# EAGLE board E-Reader_v59 (EAGLE 9.7.0)
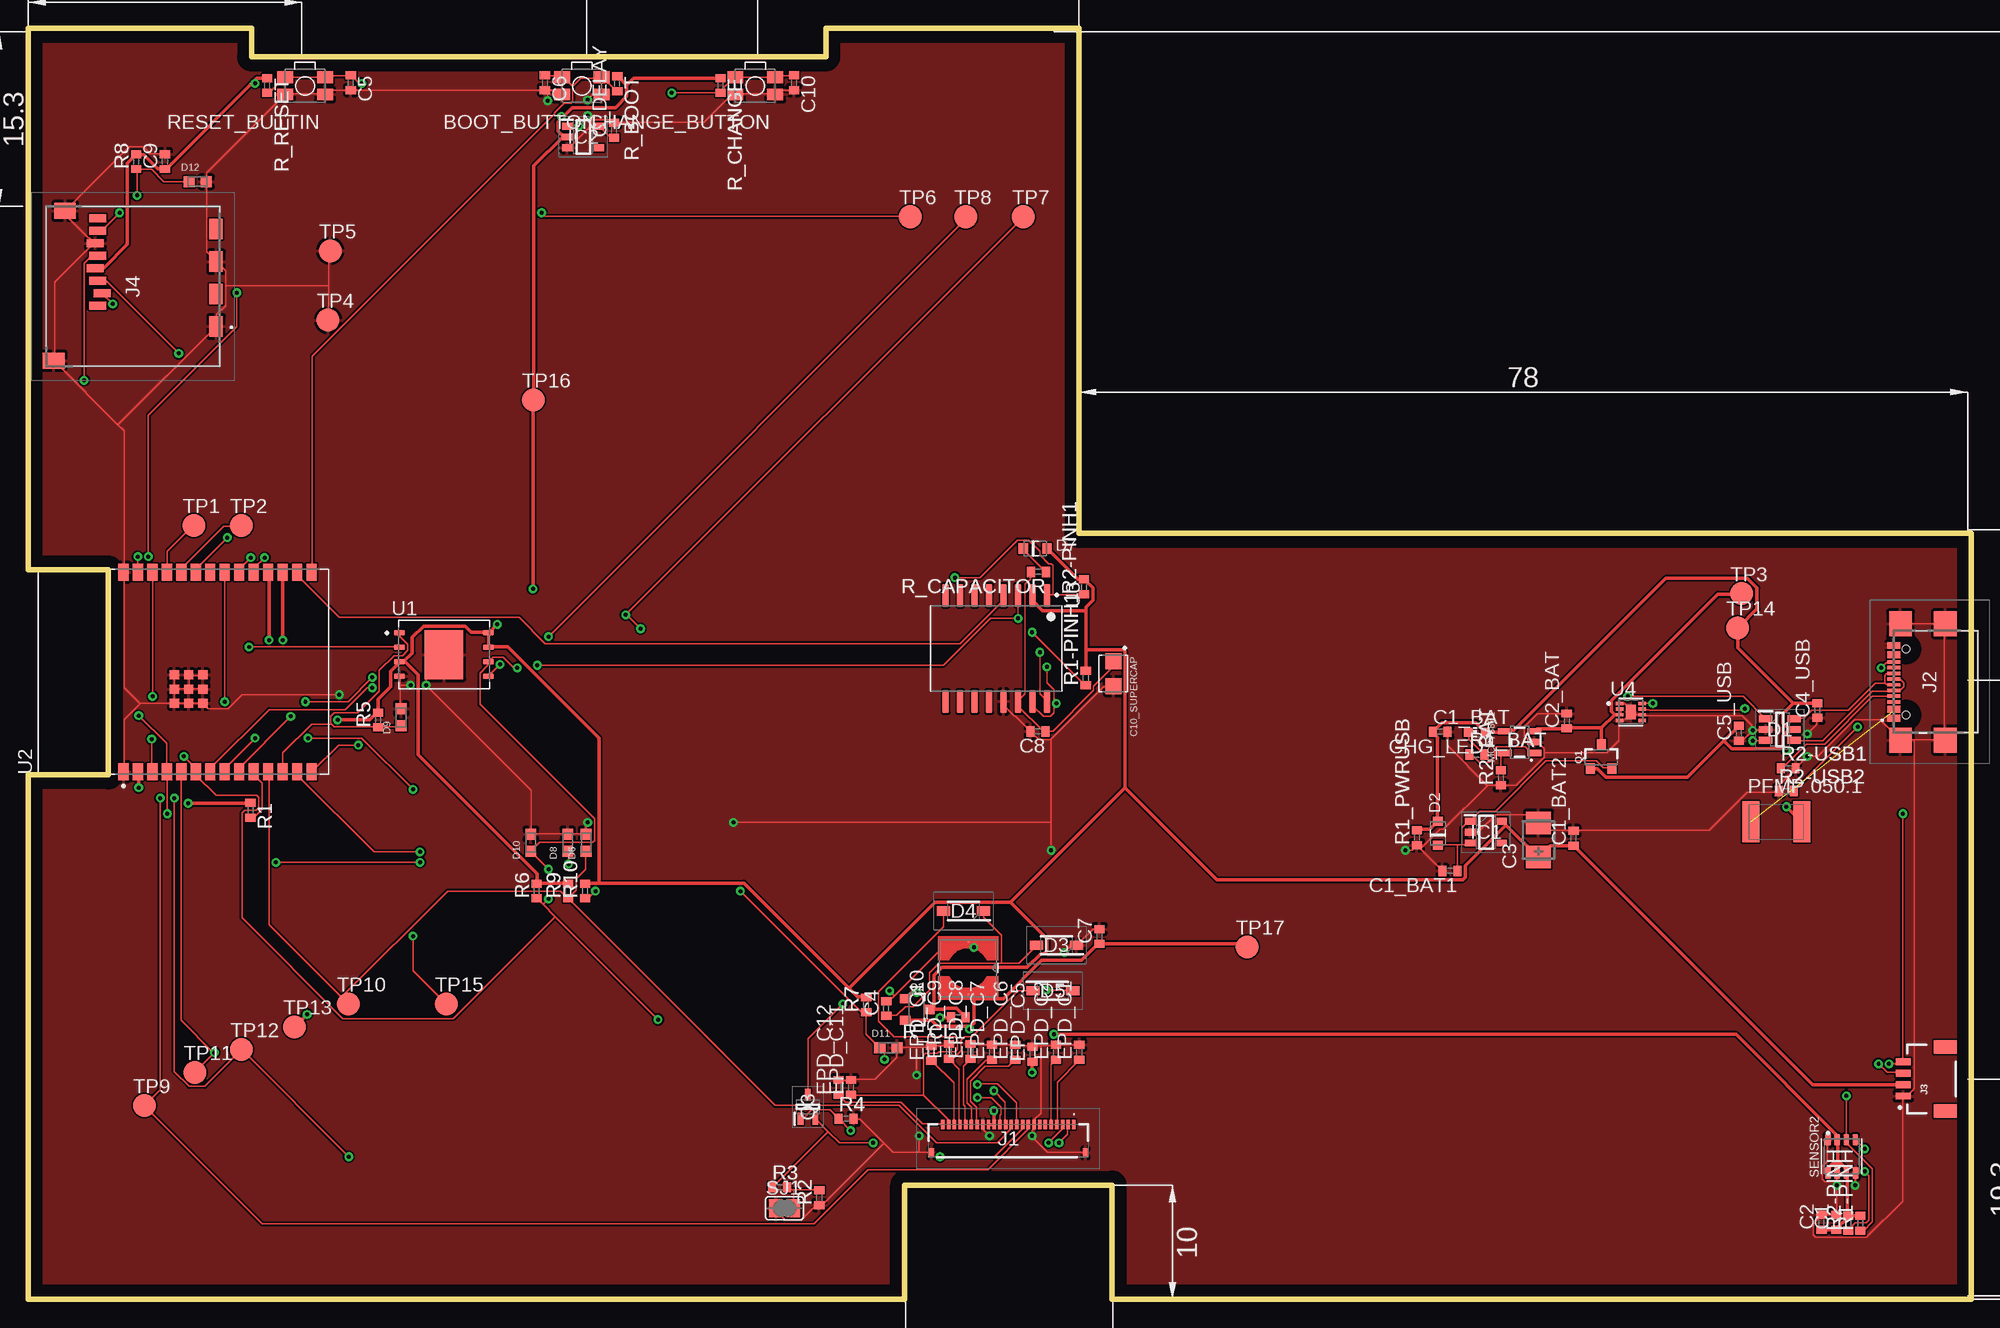
[diagram p0: board, top side]
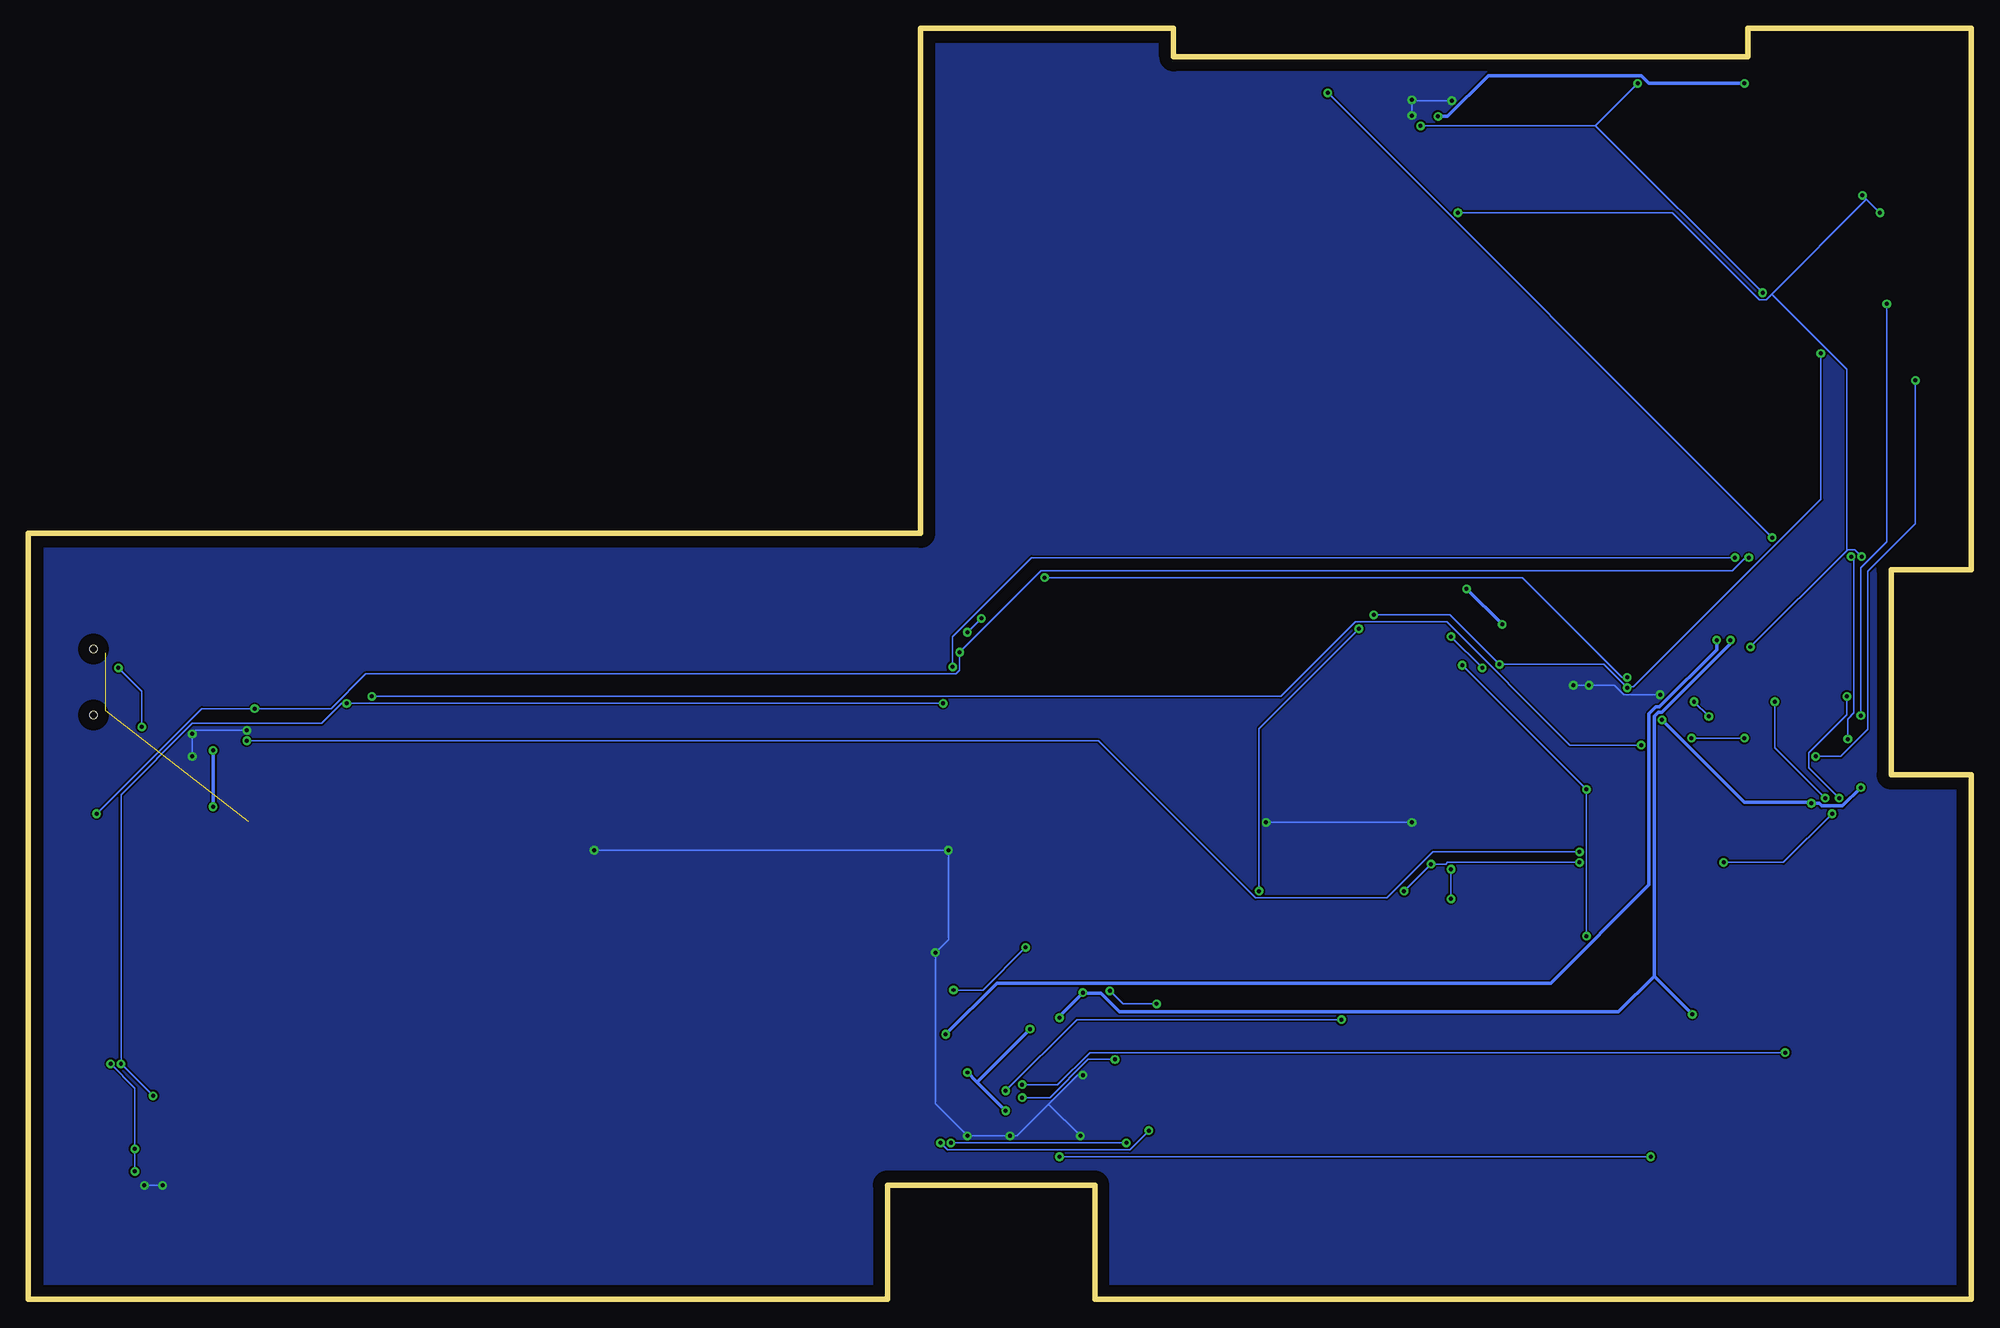
[diagram p1: board, bottom side, seen from below]

Size 170.5 x 111.5 mm. Coordinates in mm from the lower left corner, seen from the top.
Outline: 0,0 0,46 7,46 7,64 0,64 0,111.5 19.58,111.5 19.58,109 70,109 70,111.5 92.2,111.5 92.2,67.2 170.5,67.2 170.5,0 95.1,0 95.1,10 76.9,10 76.9,0 0,0
Copper layers (1*16): Top 0.035mm / dielectric 1.5mm / Bottom 0.035mm
Design rules "Fusion Electronics Design Rules": minimum track width 6mil, minimum drill 0.35mm, track to track 6mil, track to pad 6mil, pad to pad 6mil, via to via 6mil, smd to smd 6mil, copper to edge 40mil, drill to drill 6mil, minimum pad ring 10mil, minimum via ring 8mil, stop-mask expansion 4mil, vias tented up to drill 9999mil, thermal gap 10mil
Net classes: 0 default: width 0.15 mm; 2 power: width 0.3 mm

## Footprints (pad centres in the part's own frame; a part is rotated, then mirrored left to right if it is on the bottom)
MYBUTTON = smd 1.4 x 1.05: 1 1.75,0.75; 2 -1.75,0.75; 3 -1.75,-0.75; 4 1.75,-0.75
EAGLE-LTSPICE_C0402 = smd 0.7 x 0.9: 1 -0.65,0; 2 0.65,0
RCL_CT3528 = smd 2 x 2.2: + -1.5,0; - 1.5,0
CAPCP3225X100N = smd 1.4 x 1.4: 1 -1.1,0; 2 1.1,0
ADAFRUIT_CHIP-LED0603 = smd 0.8 x 0.8: A 0,-0.75; C 0,0.75
SOT95P280X145-6N = smd 1.2 x 0.6: 1 -1.25,0.95; 2 -1.25,0; 3 -1.25,-0.95; 4 1.25,-0.95; 5 1.25,0; 6 1.25,0.95
ESP32_WROVER_AVX---SD0805S020S1R0_AVX_SD0805S020S1R0_0 = smd 0.8 x 0.9: 1 -1.05,0; 2 1.05,0
SOD3716X135N = smd 1.15 x 0.8: 1 -1.75,0; 2 1.75,0
DIOC1608X36N = smd 0.97 x 0.94: 1 -0.75,0; 2 0.75,0
SOT95P280X120-5N = smd 0.9 x 0.6: 1 -1.4,0.95; 2 -1.4,0; 3 -1.4,-0.95; 4 1.4,-0.95; 5 1.4,0.95
SOT95P280X125-5N = smd 0.9 x 0.6: 1 -1.4,0.95; 2 -1.4,0; 3 -1.4,-0.95; 4 1.4,-0.95; 5 1.4,0.95
FH34SRJ24S05SH99 = smd 0.3 x 0.8: 1 5.75,1.45; 2 5.25,1.45; 3 4.75,1.45; 4 4.25,1.45; 5 3.75,1.45; 6 3.25,1.45; 7 2.75,1.45; 8 2.25,1.45; 9 1.75,1.45; 10 1.25,1.45; 11 0.75,1.45; 12 0.25,1.45; 13 -0.25,1.45; 14 -0.75,1.45; 15 -1.25,1.45; 16 -1.75,1.45; 17 -2.25,1.45; 18 -2.75,1.45; 19 -3.25,1.45; 20 -3.75,1.45; 21 -4.25,1.45; 22 -4.75,1.45; 23 -5.25,1.45; 24 -5.75,1.45 | smd 0.4 x 0.8: MP1 6.75,-1.05; MP2 -6.75,-1.05
SAMACSYS_PARTS_USB4110GFA = smd 0.3 x 1.15: A1 -3.35,3.678; A4 -2.55,3.678; A5 -1.25,3.678; A6 -0.25,3.678; A7 0.25,3.678; A8 1.25,3.678; A9 2.55,3.678; A12 3.35,3.678; B1 3.05,3.678; B4 2.25,3.678; B5 1.75,3.678; B6 0.75,3.678; B7 -0.75,3.678; B8 -1.75,3.678; B9 -2.25,3.678; B12 -3.05,3.678 | smd 2.18 x 2: MP1 -5.11,-0.827; MP2 5.11,-0.827; MP3 -5.11,3.103; MP4 5.11,3.103 | hole 0.65: -2.89,2.603; 2.89,2.603
JST04_1MM_RA = smd 0.6 x 1.35: 1 -1.5,0; 2 -0.5,0; 3 0.5,0; 4 1.5,0 | smd 1.2 x 2: NC1 2.8,-3.675; NC2 -2.8,-3.675
112ATAARR03ATTEND = smd 1.8 x 1.2: G1 10.6,10.4; G2 4.9,10.4; S1 7.75,10.4; S2 2.05,10.4 | smd 1.4 x 1.9: G3 13.6,-3.85; G4 0.45,-2.85 | smd 0.7 x 1.5: P1 8.8,0; P2 7.7,0.4; P3 6.6,0; P4 5.5,-0.2; P5 4.4,0; P6 3.3,-0.2; P7 2.2,0; P8 1.1,0
IND_4828-WE-TPC_WRE = smd 0.127 x 0.127: 1 -2.286,0; 2 2.286,0
ESP32_WROVER_SPARKFUN-IC-POWER_SOT23-5 = smd 0.55 x 1.2: 1 -0.95,-1.3; 2 0,-1.3; 3 0.95,-1.3; 4 0.95,1.3; 5 -0.95,1.3
ESP32C6_VARISTOR_CT/CN1812 = smd 1.5 x 3.6: 1 -2.25,0; 2 2.25,0
ESP32_WROVER_SPARKFUN-DISCRETESEMI_SOT23-3 = smd 0.8 x 0.9: 1 -0.95,-1; 2 0.95,-1; 3 0,1.1
SOT65P210X110-3N = smd 1.05 x 0.5: 1 -1.05,0.65; 2 -1.05,-0.65; 3 1.05,0
ESP32_WROVER_EAGLE-LTSPICE_R0402 = smd 0.7 x 0.9: 1 -0.65,0; 2 0.65,0
ESP32_WROVER_BME680_PSON80P300X300X100-8N = smd 1.016 x 0.5: 1 1.458,1.2; 2 1.458,0.4; 3 1.458,-0.4; 4 1.458,-1.2; 5 -1.458,-1.22; 6 -1.458,-0.4; 7 -1.458,0.4; 8 -1.458,1.2
SJ = smd 1.168 x 1.6: 1 -0.762,0; 2 0.762,0
TP20R = smd 2 x 2: TP 0,0
SON127P600X800X80-9N = smd 0.94 x 0.44: 1 -3.895,1.905; 2 -3.895,0.635; 3 -3.895,-0.635; 4 -3.895,-1.905; 5 3.895,-1.905; 6 3.895,-0.635; 7 3.895,0.635; 8 3.895,1.905 | smd 3.4 x 4.3: 9 0,0
XCVR_ESP32-C6-WROOM-1-N8 = smd 1.5 x 0.9: 1 -8.75,5.26; 2 -8.75,3.99; 3 -8.75,2.72; 4 -8.75,1.45; 5 -8.75,0.18; 6 -8.75,-1.09; 7 -8.75,-2.36; 8 -8.75,-3.63; 9 -8.75,-4.9; 10 -8.75,-6.17; 11 -8.75,-7.44; 12 -8.75,-8.71; 13 -8.75,-9.98; 14 -8.75,-11.25; 15 8.75,-11.25; 16 8.75,-9.98; 17 8.75,-8.71; 18 8.75,-7.44; 19 8.75,-6.17; 20 8.75,-4.9; 21 8.75,-3.63; 22 8.75,-2.36; 23 8.75,-1.09; 24 8.75,0.18; 25 8.75,1.45; 26 8.75,2.72; 27 8.75,3.99; 28 8.75,5.26 | smd 0.8 x 0.8: 29_1 -2.755,0.79; 29_2 -1.505,0.79; 29_3 -0.255,0.79; 29_4 -2.755,-0.46; 29_5 -1.505,-0.46; 29_6 -0.255,-0.46; 29_7 -2.755,-1.71; 29_8 -1.505,-1.71; 29_9 -0.255,-1.71
SOIC127P1032X265-16N = smd 2.05 x 0.59: 1 -4.655,4.445; 2 -4.655,3.175; 3 -4.655,1.905; 4 -4.655,0.635; 5 -4.655,-0.635; 6 -4.655,-1.905; 7 -4.655,-3.175; 8 -4.655,-4.445; 9 4.655,-4.445; 10 4.655,-3.175; 11 4.655,-1.905; 12 4.655,-0.635; 13 4.655,0.635; 14 4.655,1.905; 15 4.655,3.175; 16 4.655,4.445
SON50P200X200X80-9N = smd 0.76 x 0.27: 1 -0.985,0.75; 2 -0.985,0.25; 3 -0.985,-0.25; 4 -0.985,-0.75; 5 0.985,-0.75; 6 0.985,-0.25; 7 0.985,0.25; 8 0.985,0.75 | smd 0.9 x 1.3: 9 0,0

## Placement (x,y rotation side)
BOOT_BUTTON  [MYBUTTON]  48.57,106.46 180 top
C1  100nF  [EAGLE-LTSPICE_C0402]  158.69,6.74 90 top
C1_BAT  4.7uF  [EAGLE-LTSPICE_C0402]  123.9,49.79 0 top
C1_BAT1  4.7uF  [EAGLE-LTSPICE_C0402]  124.77,37.58 180 top
C1_BAT2  4.7uF  [EAGLE-LTSPICE_C0402]  135.61,40.45 90 top
C2  100nF  [EAGLE-LTSPICE_C0402]  157.37,6.74 90 top
C2_BAT  4.7uF  [EAGLE-LTSPICE_C0402]  135.01,50.74 90 top
C3  100uF TANT  [RCL_CT3528]  132.53,40.29 90 top
C4  4.7uF/25V  [EAGLE-LTSPICE_C0402]  75.28,25.5 90 top
C4_USB  100nF  [EAGLE-LTSPICE_C0402]  157.01,51.66 90 top
C5  1uF  [EAGLE-LTSPICE_C0402]  28.29,106.73 270 top
C5_USB  4.7 uF  [EAGLE-LTSPICE_C0402]  150.12,49.66 90 top
C6  100nF  [EAGLE-LTSPICE_C0402]  45.33,106.73 270 top
C7  10uF  [EAGLE-LTSPICE_C0402]  94.01,31.82 90 top
C8  100nF  [EAGLE-LTSPICE_C0402]  88.6,49.82 180 top
C9  100nF  [EAGLE-LTSPICE_C0402]  11.98,99.82 90 top
C10  100nF  [EAGLE-LTSPICE_C0402]  67.19,106.73 270 top
C10_SUPERCAP  CPH3225A  [CAPCP3225X100N]  95.23,54.88 270 top
C_DELAY  100nF  [EAGLE-LTSPICE_C0402]  51.41,102.58 90 top
CHANGE_BUTTON  [MYBUTTON]  63.79,106.46 180 top
CHG_LED  [ADAFRUIT_CHIP-LED0603]  127.12,49.75 90 top
D1  USBLC6-2SC6Y  [SOT95P280X145-6N]  153.72,49.98 0 top
D2  ESP32_WROVER_AVX---SD0805S020S1R0_AVX_SD0805S020S1R0_0_0AVX_SD0805S020S1R0_0_0  [ESP32_WROVER_AVX---SD0805S020S1R0_AVX_SD0805S020S1R0_0]  123.71,40.87 90 top
D3  MBR0530  [SOD3716X135N]  90.23,31.06 180 top
D4  MBR0530  [SOD3716X135N]  82.07,34.06 180 top
D5  MBR0530  [SOD3716X135N]  89.91,27.06 0 top
D6  PGB1010603MR  [DIOC1608X36N]  48.95,40.06 90 top
D7  SD0805S020S1R0  [ESP32_WROVER_AVX---SD0805S020S1R0_AVX_SD0805S020S1R0_0]  88.36,65.87 0 top
D8  PGB1010603MR  [DIOC1608X36N]  47.33,40.06 90 top
D9  PGB1010603MR  [DIOC1608X36N]  32.71,51.06 90 top
D10  PGB1010603MR  [DIOC1608X36N]  44.09,40.06 90 top
D11  PGB1010603MR  [DIOC1608X36N]  75.47,22.06 0 top
D12  PGB1010603MR  [DIOC1608X36N]  14.85,98.06 0 top
EPD_C1  1uF/50V  [EAGLE-LTSPICE_C0402]  92.23,21.66 90 top
EPD_C2  1uF/50V  [EAGLE-LTSPICE_C0402]  90.18,21.66 90 top
EPD_C5  0.1uF/50V  [EAGLE-LTSPICE_C0402]  88.12,21.5 90 top
EPD_C6  1uF/50V  [EAGLE-LTSPICE_C0402]  86.61,21.66 90 top
EPD_C7  1uF/50V  [EAGLE-LTSPICE_C0402]  84.56,21.66 90 top
EPD_C8  1uF/50V  [EAGLE-LTSPICE_C0402]  82.68,21.74 90 top
EPD_C9  1uF/50V  [EAGLE-LTSPICE_C0402]  80.79,21.74 90 top
EPD_C10  1uF/50V  [EAGLE-LTSPICE_C0402]  79.25,21.58 90 top
EPD_C11  1uF/50V  [EAGLE-LTSPICE_C0402]  72.2,18.58 90 top
EPD_C12  1uF/50V  [EAGLE-LTSPICE_C0402]  71.09,18.58 90 top
IC1  XC6220A331MR-G  [SOT95P280X120-5N]  127.93,40.98 0 top
IC2  BD5229G-TR  [SOT95P280X125-5N]  48.69,101.98 0 top
J1  FH34SRJ-24S-0.5SH_99_  [FH34SRJ24S05SH99]  86.01,13.88 0 top
J2  [SAMACSYS_PARTS_USB4110GFA]  167.41,54.16 90 top
J3  QWIIC_RIGHT_ANGLE  [JST04_1MM_RA]  164.56,19.32 90 top
J4  112A-TAAR-R03_ATTEND  [112ATAARR03ATTEND]  6.07,95.95 270 top
L1  68uH  [IND_4828-WE-TPC_WRE]  82.47,29.05 270 top
MCP73831  [ESP32_WROVER_SPARKFUN-IC-POWER_SOT23-5]  130.88,48.88 90 top
PFMP.050.1  [ESP32C6_VARISTOR_CT/CN1812]  153.41,41.88 0 top
Q1  20V/4.2A/52mΩ/1.4W  [ESP32_WROVER_SPARKFUN-DISCRETESEMI_SOT23-3]  138.04,47.56 0 top
Q2  20V/4.2A/52mΩ/1.4W  [ESP32_WROVER_SPARKFUN-DISCRETESEMI_SOT23-3]  77.96,25.41 270 top
Q3  SI1308EDL-T1-GE3  [SOT65P210X110-3N]  68.41,16.87 90 top
R1  10k  [ESP32_WROVER_EAGLE-LTSPICE_R0402]  19.49,42.9 270 top
R1-PINH  10K  [ESP32_WROVER_EAGLE-LTSPICE_R0402]  160.79,6.66 90 top
R1-PINH1  10K  [ESP32_WROVER_EAGLE-LTSPICE_R0402]  92.8,54.5 90 top
R1_BAT  200  [ESP32_WROVER_EAGLE-LTSPICE_R0402]  127.12,47.79 0 top
R1_PWRUSB  100k  [ESP32_WROVER_EAGLE-LTSPICE_R0402]  121.87,40.5 90 top
R2  2.2  [ESP32_WROVER_EAGLE-LTSPICE_R0402]  69.41,8.9 90 top
R2-PINH  10K  [ESP32_WROVER_EAGLE-LTSPICE_R0402]  159.74,6.66 90 top
R2-PINH1  10K  [ESP32_WROVER_EAGLE-LTSPICE_R0402]  92.64,62.5 90 top
R2-USB1  5k1  [ESP32_WROVER_EAGLE-LTSPICE_R0402]  154.45,46.58 0 top
R2-USB2  5k1  [ESP32_WROVER_EAGLE-LTSPICE_R0402]  154.29,44.58 0 top
R2_BAT  2K  [ESP32_WROVER_EAGLE-LTSPICE_R0402]  129.23,45.74 90 top
R3  0.47  [ESP32_WROVER_EAGLE-LTSPICE_R0402]  65.93,9.82 0 top
R4  10K  [ESP32_WROVER_EAGLE-LTSPICE_R0402]  71.77,15.82 0 top
R5  10K  [ESP32_WROVER_EAGLE-LTSPICE_R0402]  30.69,50.82 90 top
R6  10K  [ESP32_WROVER_EAGLE-LTSPICE_R0402]  44.61,35.82 90 top
R7  10K  [ESP32_WROVER_EAGLE-LTSPICE_R0402]  73.53,25.82 90 top
R8  10K  [ESP32_WROVER_EAGLE-LTSPICE_R0402]  9.45,99.82 90 top
R9  10K  [ESP32_WROVER_EAGLE-LTSPICE_R0402]  47.37,35.82 90 top
R10  10K  [ESP32_WROVER_EAGLE-LTSPICE_R0402]  48.85,35.82 90 top
R_BOOT  10K  [ESP32_WROVER_EAGLE-LTSPICE_R0402]  51.68,106.66 270 top
R_CAPACITOR  15  [ESP32_WROVER_EAGLE-LTSPICE_R0402]  88.64,63.82 180 top
R_CHANGE  10K  [ESP32_WROVER_EAGLE-LTSPICE_R0402]  60.74,106.5 270 top
R_CL1  10K  [ESP32_WROVER_EAGLE-LTSPICE_R0402]  81.61,24.74 180 top
R_RESET  10K  [ESP32_WROVER_EAGLE-LTSPICE_R0402]  20.96,106.5 270 top
RESET_BUTTIN  [MYBUTTON]  24.28,106.46 180 top
SENSOR2  BME688  [ESP32_WROVER_BME680_PSON80P300X300X100-8N]  159.15,12.53 90 top
SJ1  [SJ]  66.36,7.98 0 top
TP1  TPTP20R  [TP20R]  14.53,67.9 0 top
TP2  TPTP20R  [TP20R]  18.68,67.89 0 top
TP3  TPTP20R  [TP20R]  150.37,61.9 0 top
TP4  TPTP20R  [TP20R]  26.29,85.9 0 top
TP5  TPTP20R  [TP20R]  26.49,91.98 0 top
TP6  TPTP20R  [TP20R]  77.41,94.98 0 top
TP7  TPTP20R  [TP20R]  87.33,94.98 0 top
TP8  TPTP20R  [TP20R]  82.25,94.98 0 top
TP9  TPTP20R  [TP20R]  10.17,16.98 0 top
TP10  TPTP20R  [TP20R]  28.06,25.9 0 top
TP11  TPTP20R  [TP20R]  14.61,19.9 0 top
TP12  TPTP20R  [TP20R]  18.71,21.9 0 top
TP13  TPTP20R  [TP20R]  23.36,23.9 0 top
TP14  TPTP20R  [TP20R]  150.01,58.9 0 top
TP15  TPTP20R  [TP20R]  36.66,25.9 0 top
TP16  TPTP20R  [TP20R]  44.31,78.9 0 top
TP17  TPTP20R  [TP20R]  106.96,30.9 0 top
U1  W25Q512JVEIQ  [SON127P600X800X80-9N]  36.47,56.56 0 top
U2  ESP32-C6-WROOM-1-N8  [XCVR_ESP32-C6-WROOM-1-N8]  13.6,55.04 90 top
U3  DS3231SN#  [SOIC127P1032X265-16N]  84.95,57.1 270 top
U4  MAX17048G+T10  [SON50P200X200X80-9N]  140.64,51.53 0 top

## Library data of the parts
BOOT_BUTTON CHANGE_BUTTON CHG_LED PFMP.050.1 RESET_BUTTIN SJ1 TP1-TP17 = DeskAssistant v19 v1.flbr
C1 C1_BAT C1_BAT1 C1_BAT2 C2 C2_BAT C4 C4_USB C5 C5_USB C6-C10 C_DELAY EPD_C1 EPD_C2 EPD_C5-EPD_C12 = DeskAssistant v19 v1.flbr; SPICEMODEL: NONE; SPICEPREFIX: C
C3 = DeskAssistant v19 v1.flbr; SPICEPREFIX: C
C10_SUPERCAP = DeskAssistant v19 v1.flbr; AVAILABILITY: Not in stock; CHECK_PRICES: https://www.snapeda.com/parts/CPH3225A/Seiko+Instruments/view-part/?ref=eda; DESCRIPTION: 11 mF (EDLC) Supercapacitor 3.3 V 1210 (3225 Metric) - -; MF: Seiko Instruments; MP: CPH3225A; PACKAGE: 1210 Seiko; PRICE: None; PURCHASE-URL: https://www.snapeda.com/api/url_track_click_mouser/?unipart_id=562593&manufacturer=Seiko Instruments&part_name=CPH3225A&search_term=None; SNAPEDA_LINK: https://www.snapeda.com/parts/CPH3225A/Seiko+Instruments/view-part/?ref=snap
D1 = DeskAssistant v19 v1.flbr; AVAILABILITY: In Stock; CHECK_PRICES: https://www.snapeda.com/parts/USBLC6-2SC6Y/STMicroelectronics/view-part/?ref=eda; DESCRIPTION: 17V Clamp 5A (8/20µs) Ipp Tvs Diode Surface Mount SOT-23-6; MF: STMicroelectronics; MP: USBLC6-2SC6Y; PACKAGE: SOT-23-6 STMicroelectronics; PRICE: None; SNAPEDA_LINK: https://www.snapeda.com/parts/USBLC6-2SC6Y/STMicroelectronics/view-part/?ref=snap
D2 D7 = DeskAssistant v19 v1.flbr; CENTROID_NOT_SPECIFIED: No; DATASHEET: http://datasheets.avx.com/schottky.pdf; DIGIKEY_DESCRIPTION: DIODE SCHOTTKY 20V 1A 0805; DIGIKEY_PART_NUMBER: 478-7800-1-ND; LEAD_FREE: yes; MF: AVX; MOUSER_PART_NUMBER: 581-SD0805S020S1R0; PACKAGE: 0805 (2012 metric); PREFIX: D; ROHS: yes; TEMPERATURE_RANGE_HIGH: +125°C; TEMPERATURE_RANGE_LOW: -55°C
D3-D5 = DeskAssistant v19 v1.flbr; AVAILABILITY: In Stock; CHECK_PRICES: https://www.snapeda.com/parts/MBR0530/Onsemi/view-part/?ref=eda; DESCRIPTION: Diode Schottky 30 V 500mA Surface Mount SOD-123; MF: ON Semiconductor; MP: MBR0530; PACKAGE: SOD-123-2 ON Semiconductor; PRICE: None; PURCHASE-URL: https://www.snapeda.com/api/url_track_click_mouser/?unipart_id=179458&manufacturer=ON Semiconductor&part_name=MBR0530&search_term=None; SNAPEDA_LINK: https://www.snapeda.com/parts/MBR0530/Onsemi/view-part/?ref=snap
D6 D8-D12 = DeskAssistant v19 v1.flbr; AVAILABILITY: In Stock; CHECK_PRICES: https://www.snapeda.com/parts/PGB1010603MR/Littelfuse/view-part/?ref=eda; DESCRIPTION: 150V (Typ) Clamp - Ipp Tvs Diode Surface Mount 0603 (1608 Metric); MF: Littelfuse Inc.; MP: PGB1010603MR; PACKAGE: 0603 Littelfuse Inc.; PRICE: None; PURCHASE-URL: https://www.snapeda.com/api/url_track_click_mouser/?unipart_id=5659453&manufacturer=Littelfuse Inc.&part_name=PGB1010603MR&search_term=None; SNAPEDA_LINK: https://www.snapeda.com/parts/PGB1010603MR/Littelfuse/view-part/?ref=snap
IC1 = DeskAssistant v19 v1.flbr; DESCRIPTION: LDO Voltage Regulators; HEIGHT: 1.2mm; MANUFACTURER_NAME: Torex; MANUFACTURER_PART_NUMBER: XC6220A331MR-G; MOUSER_PART_NUMBER: 865-XC6220A331MR-G; MOUSER_PRICE-STOCK: https://www.mouser.co.uk/ProductDetail/Torex-Semiconductor/XC6220A331MR-G?qs=AsjdqWjXhJ8ZSWznL1J0gg%3D%3D
IC2 = DeskAssistant v19 v1.flbr; DESCRIPTION: Voltage Detector with Adjustable Delay Time: CMOS processes are utilized to develop high precision, low current consumption CMOS reset ICs that allow arbitrary setting of the delay time. The extensive lineup includes both Nch Open Drain and CMOS output types in a wide range of detection voltages (from 2.3V to 6.0V, in 0.1V steps), enabling selection of the ideal solution based on customer requirements. In addition, the entire series is of course both lead-free and RoHS-compliant.; HEIGHT: 1.25mm; MANUFACTURER_NAME: ROHM Semiconductor; MANUFACTURER_PART_NUMBER: BD5229G-TR; MOUSER_PART_NUMBER: 755-BD5229G-TR; MOUSER_PRICE-STOCK: https://www.mouser.co.uk/ProductDetail/ROHM-Semiconductor/BD5229G-TR?qs=4kLU8WoGk0vvnhrrYwdszw%3D%3D
J1 = DeskAssistant v19 v1.flbr; DESCRIPTION: 24 Position FFC, FPC Connector Contacts, Top and Bottom 0.020" (0.50mm) Surface Mount, Right Angle; HEIGHT: 1.1mm; MANUFACTURER_NAME: Hirose; MANUFACTURER_PART_NUMBER: FH34SRJ-24S-0.5SH(99); MOUSER_PART_NUMBER: 798-FH34SRJ24S05SH99; MOUSER_PRICE-STOCK: https://www.mouser.co.uk/ProductDetail/Hirose-Connector/FH34SRJ-24S-0.5SH99?qs=vcbW%252B4%252BSTIpKBl5ap9J8Fw%3D%3D
J2 = DeskAssistant v19 v1.flbr; DESCRIPTION: CONN USB 2.0 TYPE-C R/A SMT; HEIGHT: 3.26mm; MANUFACTURER_NAME: GCT (GLOBAL CONNECTOR TECHNOLOGY); MANUFACTURER_PART_NUMBER: USB4110-GF-A; MOUSER_PART_NUMBER: 640-USB4110-GF-A; MOUSER_PRICE-STOCK: https://www.mouser.co.uk/ProductDetail/GCT/USB4110-GF-A?qs=KUoIvG%2F9IlYiZvIXQjyJeA%3D%3D
J3 = DeskAssistant v19 v1.flbr; PROD_ID: CONN-13694
J4 = DeskAssistant v19 v1.flbr; DESCRIPTION: Micro SD Card Socket, Push-Push Type, Top Mount, SMT, H=1.83mm, 10u; HEIGHT: 1.9mm; MANUFACTURER_NAME: ATTEND; MANUFACTURER_PART_NUMBER: 112A-TAAR-R03 ATTEND
L1 = DeskAssistant v19 v1.flbr; COPYRIGHT: Copyright (C) 2024 Ultra Librarian. All rights reserved.; MANUFACTURER_PART_NUMBER: 744043680; MFR_NAME: Wurth Electronics
MCP73831 = DeskAssistant v19 v1.flbr; PROD_ID: IC-09995
Q1 = DeskAssistant v19 v1.flbr; PROD_ID: TRAN-14388
Q2 = DeskAssistant v19 v1.flbr; PROD_ID: TRAN-14388; SPICEPREFIX: Q
Q3 = DeskAssistant v19 v1.flbr; AVAILABILITY: In Stock; CHECK_PRICES: https://www.snapeda.com/parts/SI1308EDL-T1-GE3/Vishay+Siliconix/view-part/?ref=eda; DESCRIPTION: Si1308EDL-T1-GE3 N-channel MOSFET Transistor, 1.5 A, 30 V, 3-Pin SC-70 | Siliconix / Vishay SI1308EDL-T1-GE3; MF: Vishay Siliconix; MP: SI1308EDL-T1-GE3; PACKAGE: SOT-323 Vishay Semiconductor; PRICE: None; PURCHASE-URL: https://www.snapeda.com/api/url_track_click_mouser/?unipart_id=274603&manufacturer=Vishay Siliconix&part_name=SI1308EDL-T1-GE3&search_term=None; SNAPEDA_LINK: https://www.snapeda.com/parts/SI1308EDL-T1-GE3/Vishay+Siliconix/view-part/?ref=snap
R1 R1-PINH R1-PINH1 R1_BAT R1_PWRUSB R2 R2-PINH R2-PINH1 R2-USB1 R2-USB2 R2_BAT R3-R10 R_BOOT R_CAPACITOR R_CHANGE R_CL1 R_RESET = DeskAssistant v19 v1.flbr; SPICEMODEL: NONE; SPICEPREFIX: R
SENSOR2 = DeskAssistant v19 v1.flbr; AVAILABILITY: Unavailable; DESCRIPTION: Integrated Environmental Unit; MF: Bosch Sensortec; MP: BME680; PACKAGE: LGA-8 Bosch Tools; PRICE: None
U1 = DeskAssistant v19 v1.flbr; AVAILABILITY: In Stock; CHECK_PRICES: https://www.snapeda.com/parts/W25Q512JVEIQ/Winbond+Electronics/view-part/?ref=eda; DESCRIPTION: FLASH - NOR Memory IC 512Mb (64M x 8) SPI - Quad I/O 133 MHz 8-WSON (8x6); MF: Winbond Electronics; MP: W25Q512JVEIQ; PACKAGE: Package; PRICE: None; SNAPEDA_LINK: https://www.snapeda.com/parts/W25Q512JVEIQ/Winbond+Electronics/view-part/?ref=snap
U2 = DeskAssistant v19 v1.flbr; AVAILABILITY: In Stock; CHECK_PRICES: https://www.snapeda.com/parts/ESP32-C6-WROOM-1-N8/Espressif+Systems/view-part/?ref=eda; DESCRIPTION: Multiprotocol Modules ESP32-C6 module, Wi-Fi 6 in 2.4 GHz band, Bluetooth 5, Zigbee 3.0 and Thread. ESP34-WROOM Compatible - ENGINEERING SAMPLE; MF: Espressif Systems; MP: ESP32-C6-WROOM-1-N8; PACKAGE: None; PRICE: None; SNAPEDA_LINK: https://www.snapeda.com/parts/ESP32-C6-WROOM-1-N8/Espressif+Systems/view-part/?ref=snap
U3 = DeskAssistant v19 v1.flbr; AVAILABILITY: In Stock; CHECK_PRICES: https://www.snapeda.com/parts/DS3231SN%23/Analog+Devices/view-part/?ref=eda; DESCRIPTION: Extremely Accurate I²C-Integrated RTC/TCXO/Crystal; MF: Analog Devices; MP: DS3231SN#; PACKAGE: SOIC-16 Maxim; PRICE: None; PURCHASE-URL: https://www.snapeda.com/api/url_track_click_mouser/?unipart_id=99048&manufacturer=Analog Devices&part_name=DS3231SN#&search_term=None; SNAPEDA_LINK: https://www.snapeda.com/parts/DS3231SN%23/Analog+Devices/view-part/?ref=snap
U4 = DeskAssistant v19 v1.flbr; AVAILABILITY: In Stock; CHECK_PRICES: https://www.snapeda.com/parts/MAX17048G+T10/Analog+Devices/view-part/?ref=eda; DESCRIPTION: 3µA 1-Cell/2-Cell Fuel Gauge with ModelGauge; MF: Analog Devices; MP: MAX17048G+T10; PACKAGE: TDFN-8 Maxim; PRICE: None; PURCHASE-URL: https://www.snapeda.com/api/url_track_click_mouser/?unipart_id=329239&manufacturer=Analog Devices&part_name=MAX17048G+T10&search_term=None; SNAPEDA_LINK: https://www.snapeda.com/parts/MAX17048G+T10/Analog+Devices/view-part/?ref=snap

## Nets
3V3 [power]: C1_BAT2.1 C3.+ C9.1 D7.2 IC1.5 IC2.2 J3.2 J4.P4 Q2.3 R1-PINH1.2 R1.1 R2-PINH1.2 R5.2 R6.2 R7.2 R8.2 R9.2 R10.2 R_BOOT.1 R_CHANGE.1 R_CL1.1 R_RESET.1 TP16.TP U1.3 U1.7 U1.8 U2.2 U3.2
32KHZ: R2-PINH1.1 U2.9 U3.1
DN: D1.4 J2.A7 J2.B7
DP: D1.6 J2.A6 J2.B6
EPD_3V3 [power]: C7.1 EPD_C5.1 J1.15 J1.16 L1.2 Q2.2 TP17.TP
EPD_3V3_C [power]: Q2.1 R_CL1.2 TP13.TP U2.18
EPD_BUSY: J1.9 TP9.TP U2.26
EPD_CS: D6.1 J1.12 R9.1 TP10.TP U2.11
EPD_DC: J1.11 TP11.TP U2.5
EPD_RST: J1.10 TP12.TP U2.21
FLASH_CS: D9.1 R5.1 U1.1 U2.12
GDR: J1.2 Q3.1 R4.1
GND: BOOT_BUTTON.1 BOOT_BUTTON.2 C1.2 C1_BAT1.2 C1_BAT2.2 C1_BAT.2 C2.2 C2_BAT.2 C3.- C4_USB.1 C5.2 C5_USB.1 C6.2 C7.2 C8.2 C9.2 C10.2 C10_SUPERCAP.2 C_DELAY.2 CHANGE_BUTTON.1 CHANGE_BUTTON.2 D1.2 D3.1 D6.2 D8.2 D9.2 D10.2 D11.2 D12.2 EPD_C1.2 EPD_C2.2 EPD_C5.2 EPD_C6.2 EPD_C7.2 EPD_C8.2 EPD_C9.2 EPD_C10.2 EPD_C11.2 EPD_C12.2 IC1.2 IC2.3 J1.8 J1.17 J1.MP1 J1.MP2 J2.A1 J2.A12 J2.B1 J2.B12 J2.MP1 J2.MP2 J2.MP3 J2.MP4 J3.1 J4.G1 J4.G2 J4.G3 J4.G4 J4.P6 MCP73831.2 R1_PWRUSB.1 R2-USB1.2 R2-USB2.1 R2.1 R2_BAT.1 R4.2 RESET_BUTTIN.1 RESET_BUTTIN.2 SENSOR2.1 SENSOR2.5 SENSOR2.7 SJ1.1 TP4.TP TP5.TP U1.4 U1.9 U2.1 U2.28 U2.29_1 U2.29_2 U2.29_3 U2.29_4 U2.29_5 U2.29_6 U2.29_7 U2.29_8 U2.29_9 U3.13 U4.1 U4.4 U4.6 U4.9
GPIO8: R1.2 U2.10
I2C_PW [power]: C1.1 C2.1 R1-PINH.2 R2-PINH.2 SENSOR2.2 SENSOR2.6 SENSOR2.8 U2.17
INT_RTC: R1-PINH1.1 TP15.TP U2.8 U3.3
IO/BOOT: BOOT_BUTTON.3 BOOT_BUTTON.4 C6.1 R_BOOT.2 U2.15
IO/CHANGE: C10.1 CHANGE_BUTTON.3 CHANGE_BUTTON.4 R_CHANGE.2 U2.23
MISO: D12.1 J4.P7 R8.1 TP6.TP U1.2 U2.27
MOSI: D11.1 J1.14 J4.P3 R7.1 TP7.TP U1.5 U2.7
N$1: C1_BAT1.1 D2.1 IC1.1 IC1.3 Q1.2
N$2: J2.A5 R2-USB1.1
N$3: EPD_C12.1 J1.24
N$4: C_DELAY.1 IC2.5
N$5: C4.1 D3.2 D4.1
N$6: MCP73831.1 R1_BAT.1
N$7: CHG_LED.C R1_BAT.2
N$8: J2.B5 R2-USB2.2
N$9: MCP73831.5 R2_BAT.2
N$10: EPD_C10.1 J1.22
N$12: EPD_C8.1 J1.20
N$13: EPD_C7.1 J1.19
N$14: EPD_C6.1 J1.18
N$16: EPD_C1.1 J1.4
N$17: EPD_C2.1 J1.5
N$22: D7.1 R_CAPACITOR.1
PREVGH: D5.1 EPD_C9.1 J1.21
PREVGL: D4.2 EPD_C11.1 J1.23
RESE: J1.3 Q3.2 R3.1
RESE': R2.2 R3.2 SJ1.2
RESET: C5.1 IC2.1 R_RESET.2 RESET_BUTTIN.3 RESET_BUTTIN.4 U2.3
RTC_RST: U2.16 U3.4
RX: TP2.TP U2.24
SCK: D10.1 J1.13 J4.P5 R6.1 TP8.TP U1.6 U2.6
SCL: J3.4 R2-PINH.1 SENSOR2.4 U2.20 U3.16 U4.7
SDA: J3.3 R1-PINH.1 SENSOR2.3 U2.19 U3.15 U4.8
SRC: C4.2 D5.2 L1.1 Q3.3
SS_SD: D8.1 J4.P2 R10.1 U2.4
TX: TP1.TP U2.25
USB_D+: D1.1 U2.14
USB_D-: D1.3 U2.13
VBAT [power]: C2_BAT.1 MCP73831.3 Q1.3 TP3.TP U4.2 U4.3
VBUS [power]: C1_BAT.1 C4_USB.2 C5_USB.2 CHG_LED.A D1.5 D2.2 MCP73831.4 PFMP.050.1.2 Q1.1 R1_PWRUSB.2 TP14.TP
VRTC: C8.1 C10_SUPERCAP.1 R_CAPACITOR.2 U3.14
VUSB [power]: J2.A4 J2.A9 J2.B4 J2.B9 PFMP.050.1.1

## Tracks (layer width: path | path; a pad name or v marks a point on that pad's centre or on a via)
3V3  (via drill 0.35)
  Top 0.3: 19.74,106.83 12.12,99.21 C9.1 11.96,99.21 11.35,99.21 10.13,100.43 9.53,100.43 R8.2 9.37,100.36 8.69,99.67 8.69,92.58 6.63,90.53 5.87,90.53 J4.P4 | 19.74,106.83 20.04,107.14 20.95,107.14 R_RESET.1 | 46.86,103.71 47.7,104.55 51.51,104.55 52.5,105.54 52.5,106.53 | 46.86,103.71 46.48,103.33 46.48,102.49 46.94,102.03 47.24,102.03 IC2.2 46.86,101.96 44.35,99.44 44.35,78.94 TP16.TP 44.27,78.79 v44.27,62.33 | 52.5,106.53 51.74,107.29 R_BOOT.1 | 52.5,106.53 53.11,107.14 60.73,107.14 R_CHANGE.1 | v19.89,106.68 19.74,106.83 | v46.79,103.78 46.86,103.71 | v14.02,43.51 19.43,43.51 R1.1 | v9.68,44.88 9.68,46.25 U2.2 | R9.2 47.32,36.5 44.65,36.5 R6.2 44.65,36.65 44.65,37.34 34.21,47.78 34.21,54.79 32.99,56.01 | U1.8 40.39,58.45 40.39,57.23 U1.7 40.54,57.23 42.06,57.23 50.06,49.23 50.06,36.5 | 32.99,56.01 33.68,56.69 33.68,58.06 34.67,59.05 38.33,59.05 38.86,58.52 40.23,58.52 U1.8 | 32.99,56.01 32.69,56.01 U1.3 32.54,55.85 31.77,55.09 31.77,53.72 30.71,52.65 30.71,51.51 R5.2 30.56,51.44 29.95,50.83 v27.13,50.83 | 129.69,41.6 132.51,38.79 C3.+ 132.66,38.86 133.58,39.78 135.56,39.78 C1_BAT2.1 135.71,39.7 156.59,18.82 164.52,18.82 J3.2 | 129.69,41.6 129.39,41.91 IC1.5 | D7.2 89.46,65.84 92.13,63.17 92.58,63.17 R2-PINH1.2 92.73,63.09 93.42,62.41 93.42,61.34 92.81,60.73 92.81,60.43 | 92.81,60.43 92.81,57 | 92.81,57 92.81,55.17 R1-PINH1.2 | 92.81,60.43 89,60.43 88.16,61.27 88.16,61.72 U3.2 | R_CL1.1 82.22,24.77 81.46,25.53 80.47,25.53 80.39,25.45 79.1,25.45 Q2.3 79.48,25.53 79.48,28.42 80.16,29.11 87.63,29.11 88.85,30.33 89.15,30.33 89.38,30.56 89.38,31.62 86.18,34.82
  Top 0.3: 72.01,27.28 62.79,36.5 50.06,36.5 | 72.01,27.28 72.77,26.52 73.46,26.52 R7.2 | 50.06,36.5 48.92,36.5 R10.2 | 86.18,34.82 79.55,34.82 72.01,27.28 | 92.81,57 96.09,57 96.24,56.84 96.24,44.88 | 86.18,34.82 96.24,44.88 | 129.69,41.6 126.11,38.02 126.11,37.03 125.88,36.8 104.32,36.8 96.24,44.88 | v41.15,59.21 40.46,58.52 U1.8
  Bottom 0.3: v19.89,106.68 28.27,106.68 28.96,107.37 42.37,107.37 45.95,103.78 v46.79,103.78 | v9.68,44.88 11.28,43.28 13.11,43.28 13.34,43.51 v14.02,43.51 14.1,43.59 19.89,43.59 v27.13,50.83 | v41.15,59.21 v44.27,62.33
32KHZ  (via drill 0.35)
  Top 0.152: 89.92,61.8 89.46,61.8 U3.1 | 89.92,61.8 92.58,61.8 R2-PINH1.1 | v23.01,51.13 18.52,46.63 18.52,46.33 U2.9 | v24.31,52.43 28.04,52.43 v30.18,54.56 | v81.31,63.32 83.52,63.32 86.79,66.6 87.78,66.6 88.77,65.61 88.77,65.3 89.53,64.54 89.76,64.54 89.92,64.39 89.92,61.8
  Bottom 0.152: v24.31,52.43 v23.01,51.13 | v30.18,54.56 30.63,54.56 39.4,63.32 v81.31,63.32
DN
  Top 0.152: J2.A7 163.75,54.41 164.29,54.41 164.59,54.1 164.59,53.72 164.29,53.42 163.75,53.42 J2.B7 163.68,53.34 161.85,53.34 157.5,49 154.99,49 D1.4
DP
  Top 0.152: 162.95,54.06 162.92,54.1 162.92,54.71 163.07,54.86 163.68,54.86 J2.B6 | 162.95,54.06 163.07,53.95 163.68,53.95 J2.A6 | D1.6 154.99,50.98 155.83,50.98 156.51,51.66 159.72,51.66 162.08,54.03 162.92,54.03 162.95,54.06
EPD_3V3  (via drill 0.35)
  Top 0.3: J1.16 84.28,15.32 84.73,15.32 J1.15 84.73,15.47 v84.73,16.54 | v88.09,19.89 88.09,20.8 EPD_C5.1 | 82.6,23.93 82.68,23.93 82.98,24.23 82.98,26.29 | 82.6,23.93 79.78,23.93 79.25,24.46 Q2.2 | 82.98,26.29 82.53,26.75 L1.2 | TP17.TP 106.91,30.94 106.68,31.17 94.03,31.17 C7.1 93.88,31.17 92.43,29.72 88.92,29.72 85.57,26.36 83.06,26.36 82.98,26.29 | 82.6,23.93 v82.6,23.7
  Bottom 0.3: v84.73,16.54 87.25,19.05 | 87.25,19.05 v88.09,19.89 | v82.6,23.7 87.25,19.05
EPD_3V3_C  (via drill 0.35)
  Top 0.3: v80.01,24.69 80.92,24.69 R_CL1.2 | v77.95,26.9 77.5,26.9 Q2.1 | v21.11,57.84 21.11,63.78 U2.18 | v24.46,24.99 23.39,23.93 TP13.TP
  Bottom 0.3: v80.01,24.69 80.01,24.84 v77.95,26.9 77.88,26.82 76.35,26.82 74.75,25.22 30.94,25.22 27.81,28.35 | v21.11,57.84 21.11,57.53 27.13,51.51 27.43,51.51 27.81,51.13 27.81,28.35 | v24.46,24.99 27.81,28.35
EPD_BUSY  (via drill 0.35)
  Top 0.152: J1.9 87.71,15.32 87.71,14.86 84.2,11.35 73.69,11.35 68.96,6.63 20.5,6.63 10.21,16.92 TP9.TP 10.21,16.99 11.58,18.36 v11.58,43.97 | v10.9,52.88 10.9,63.78 U2.26
  Bottom 0.152: v10.9,52.88 10.9,51.28 14.25,47.93 14.25,46.63 v11.58,43.97
EPD_CS
  Top 0.152: U2.11 21.11,46.25 21.11,32.84 28.04,25.91 TP10.TP 27.51,26.52 36.8,35.81 46.71,35.81 47.32,35.2 R9.1 | J1.12 86.26,15.32 86.26,14.94 85.04,13.72 79.7,13.72 76.43,16.99 65.53,16.99 47.4,35.13 R9.1 | D6.1 48.92,39.24 48.92,37.72 48.08,36.88 48.08,35.89 47.4,35.2 R9.1
EPD_DC  (via drill 0.35)
  Top 0.152: v83.29,18.82 83.36,18.9 85.04,18.9 86.72,17.22 86.72,15.39 J1.11 | TP11.TP 14.63,19.96 v16.31,21.64 16.23,21.64 13.41,24.46 13.41,46.25 U2.5
  Bottom 0.152: v83.29,18.82 80.16,18.82 77.34,21.64 v16.31,21.64
EPD_RST  (via drill 0.35)
  Top 0.152: v80.01,12.5 84.81,12.5 87.25,14.94 87.25,15.32 J1.10 | v28.12,12.5 18.75,21.87 TP12.TP 18.67,21.87 15.47,18.67 14.1,18.67 12.8,19.96 v12.8,43.97 | v17.22,52.43 U2.21
  Bottom 0.152: v28.12,12.5 v80.01,12.5 | v17.22,52.43 17.22,48.39 v12.8,43.97
FLASH_CS
  Top 0.152: D9.1 32.69,50.29 32.61,50.22 30.71,50.22 R5.1 30.63,50.22 26.82,50.22 26.56,50.48 | 26.56,50.48 26.52,50.52 26.52,51.13 26.82,51.44 28.88,51.44 30.79,53.34 30.79,55.17 32.08,56.46 32.84,56.46 33.3,56.92 33.3,57.45 32.61,58.14 32.61,58.45 U1.1 | U2.12 22.33,46.33 22.33,47.93 24.84,50.44 26.52,50.44 26.56,50.48
GDR  (via drill 0.35)
  Top 0.152: v90.45,13.72 91.21,14.48 91.21,15.32 J1.2 | v72.16,14.78 71.17,15.77 R4.1 71.09,15.85 70.33,16.61 68.73,16.61 67.97,15.85 67.82,15.85 Q3.1
  Bottom 0.152: v90.45,13.72 89.84,13.11 73.84,13.11 v72.16,14.78
GND  (via drill 0.35)
  Top 0.152: 26.36,88.92 26.36,91.9 26.44,91.97 TP5.TP | 26.36,88.92 26.36,85.95 TP4.TP | 17.3,88.92 17.3,90.22 16.54,90.98 J4.G2 16.46,91.06 15.62,91.9 15.62,97.99 D12.2 15.62,98.07 15.62,98.83 22.48,105.69 RESET_BUTTIN.1 22.55,105.77 25.98,105.77 RESET_BUTTIN.2 26.06,105.77 26.36,106.07 28.27,106.07 C5.2 28.35,106.07 45.26,106.07 C6.2 | 17.3,88.92 17.3,87.17 16.54,86.41 16.54,85.42 J4.G1 16.46,85.34 7.85,76.73 | 17.3,88.92 26.36,88.92 | C10.2 67.13,106.07 65.91,106.07 65.61,105.77 CHANGE_BUTTON.2 65.53,105.77 62.1,105.77 CHANGE_BUTTON.1 62.03,105.69 61.72,105.69 59.28,103.25 51.44,103.25 C_DELAY.2 51.36,103.25 51.13,103.48 49.53,103.48 49.49,103.44 | 49.49,103.44 49.38,103.33 49.38,102.95 47.47,101.04 47.32,101.04 IC2.3 | v49.07,105.23 49.53,105.69 50.29,105.69 BOOT_BUTTON.2 | 49.49,103.44 v49.07,103.86 | 45.57,106.07 46.48,106.07 46.79,105.77 BOOT_BUTTON.1 | 45.57,106.07 C6.2 | 45.57,106.07 v45.57,105.16 | 45.57,106.07 C6.2 | 32.61,53.87 32.61,51.89 32.69,51.82 D9.2 | 32.61,53.87 32.61,54.63 U1.4 | v33.53,53.87 32.61,53.87 | U1.9 36.42,56.54 34.9,55.02 v34.9,53.87 44.12,44.65 44.12,40.92 D10.2 44.12,40.84 47.32,40.84 D8.2 47.4,40.84 48.92,40.84 D6.2 48.92,40.92 48.92,41.68 v49.07,41.83 | U2.29_2 12.8,53.57 12.8,54.71 U2.29_3 | U2.29_5 14.1,53.57 14.1,54.71 U2.29_6 14.17,54.71 15.24,54.71 U2.29_9 | U2.29_8 15.24,53.57 14.17,53.57 U2.29_5 | U2.29_2 12.88,53.57 14.02,53.57 U2.29_5 | U2.29_1 12.88,52.27 14.02,52.27 U2.29_4 14.1,52.27 15.24,52.27 U2.29_7 15.77,51.82 17.53,51.82 18.75,53.03 v27.28,53.03 | 9.79,52.23 9.83,52.27 U2.29_1 | 9.79,52.23 8.38,50.83 8.38,46.33 U2.1
  Top 0.152: 9.79,52.23 8.38,53.65 8.38,63.78 U2.28 8.38,63.86 8.38,76.2 7.85,76.73 | U2.29_2 12.8,53.49 12.8,52.35 U2.29_1 | C9.2 11.96,100.51 10.67,100.51 10.06,101.12 8.84,101.12 3.28,95.56 J4.G4 3.28,95.48 3.28,95.1 5.26,93.12 5.33,93.12 5.79,92.66 J4.P6 5.71,92.66 2.29,89.23 2.29,82.37 J4.G3 2.29,82.3 7.85,76.73 | SJ1.1 65.61,7.92 65.61,7.77 66.45,6.93 67.82,6.93 69.11,8.23 69.34,8.23 R2.1 69.42,8.31 69.72,8.31 75.09,13.68 | 78.18,12.88 75.89,12.88 75.09,13.68 | 78.18,12.88 79.25,12.88 J1.MP2 | 75.09,13.68 73,15.77 72.47,15.77 R4.2 | U3.13 85.65,52.43 85.65,52.05 86.56,51.13 86.64,51.13 87.94,49.84 C8.2 88.01,49.76 88.7,49.07 89.69,49.07 89.72,49.11 | 89.72,49.11 94.34,53.72 95.17,53.72 C10_SUPERCAP.2 | EPD_C12.2 71.09,19.2 72.16,19.2 EPD_C11.2 72.24,19.28 74.3,19.28 76.2,21.18 76.2,22.02 D11.2 76.28,22.1 77.95,22.1 | EPD_C9.2 80.77,22.33 80.7,22.25 79.32,22.25 EPD_C10.2 79.25,22.17 79.17,22.1 77.95,22.1 | EPD_C1.2 92.2,22.33 90.22,22.33 EPD_C2.2 90.14,22.25 88.85,22.25 | EPD_C8.2 82.75,22.33 84.51,22.33 EPD_C7.2 84.58,22.33 86.56,22.33 EPD_C6.2 86.64,22.25 88.01,22.25 88.09,22.17 EPD_C5.2 88.09,22.25 88.85,22.25 | C7.2 93.95,32.46 93.42,32.46 92.05,31.09 D3.1 91.97,31.01 91.52,31.01 v90.91,30.4 | v84.35,14.33 83.82,14.86 83.82,15.32 J1.17 | J1.MP1 92.73,12.88 89.46,12.88 88.09,14.25 v88.09,14.33 88.09,14.78 88.24,14.94 88.24,15.32 J1.8 88.32,15.39 88.32,15.77 88.85,16.31 88.85,22.25 | v77.95,19.66 77.95,22.1 | v89.76,39.4 89.76,41.83 | 89.76,41.83 89.76,49.07 89.72,49.11 | v78.18,14.33 78.18,12.88 | C1_BAT1.2 124.05,37.64 121.92,39.78 R1_PWRUSB.1
  Top 0.152: 151.29,49.87 v151.33,49.91 152.4,49.91 D1.2 | 151.29,49.87 150.5,49.07 150.19,49.07 C5_USB.1 | U4.9 140.59,51.51 140.59,51.36 140.06,50.83 139.68,50.83 U4.4 139.6,50.75 139.6,49 138.53,47.93 133.04,47.93 | U4.1 139.68,52.27 140.06,52.27 140.59,51.74 140.59,51.59 U4.9 | U4.9 140.59,51.28 141.58,51.28 U4.6 141.66,51.21 150.42,51.21 151.26,50.37 151.26,49.91 151.29,49.87 | 133.04,47.93 133.04,48.31 132.51,48.84 132.21,48.84 MCP73831.2 132.13,48.92 131.83,48.92 131.29,49.45 131.29,50.22 132.44,51.36 134.95,51.36 C2_BAT.2 | 133.04,47.93 133.04,47.55 130.61,45.11 129.24,45.11 R2_BAT.1 129.16,45.11 128.09,45.11 | 128.09,45.11 128.02,45.11 124.59,48.54 124.59,49.76 C1_BAT.2 | 128.09,45.11 124.21,41.22 123.9,41.22 122.22,39.55 R1_PWRUSB.1 | 158.72,10.29 158.72,11.05 SENSOR2.7 | v160.32,9.98 160.32,11.05 SENSOR2.5 | 158.72,10.29 157.66,10.29 157.43,10.52 157.43,11.66 157.89,12.12 157.89,13.95 SENSOR2.1 | 158.72,10.29 v158.72,9.98 158.72,7.39 C1.2 158.65,7.39 157.43,7.39 C2.2 157.35,7.32 156.67,6.63 156.67,5.64 156.9,5.41 161.31,5.41 164.52,8.61 164.52,17.75 J3.1 164.59,17.83 164.9,17.83 165.51,18.44 165.51,49.07 | IC1.2 126.57,41 127.25,41 128.78,42.52 131.83,42.52 132.51,41.83 C3.- 132.59,41.76 133.2,41.15 135.56,41.15 C1_BAT2.2 135.64,41.15 147.52,41.15 150.88,44.5 153.62,44.5 R2-USB2.1 153.69,44.65 153.69,45.19 155.07,46.56 R2-USB1.2 155.14,46.63 v156.13,47.62 157.05,47.62 160.25,50.83 162.53,50.83 164.29,49.07 J2.MP3 164.36,49.07 165.51,49.07 | v156.13,49.61 156.97,50.44 156.97,50.98 C4_USB.1 | 165.51,49.07 168.17,49.07 J2.MP1 168.17,49.15 168.17,59.21 J2.MP2 168.17,59.28 164.36,59.28 J2.MP4
  Top 0.152: v120.85,39.4 121.46,39.4 121.84,39.78 R1_PWRUSB.1 | 89.76,41.83 v61.87,41.83
  Bottom 0.152: v49.07,103.86 49.07,105.16 | v45.57,105.16 49.07,105.16 | 49.07,105.16 v49.07,105.23 | v34.9,53.87 v33.53,53.87 31.32,53.87 30.48,53.03 v27.28,53.03 | v77.95,19.66 78.41,19.66 80.96,17.11 | 80.96,17.11 83.74,14.33 v84.35,14.33 v88.09,14.33 90.91,17.14 v90.91,30.4 89.76,31.55 v89.76,39.4 v120.85,39.4 | 80.96,17.11 v78.18,14.33 | v158.72,9.98 v160.32,9.98 | v156.13,47.62 v156.13,49.61 155.83,49.91 v151.33,49.91 | v61.87,41.83 v49.07,41.83
  pour Top: 19.98,108.92 19.96,108.94 18.94,109.96 18.92,109.98 18.92,111.92 0.08,111.92 0.08,0.08 169.92,0.08 169.92,66.92 91.98,66.92 91.96,66.94 91.94,66.96 91.92,66.98 91.92,109.97 90.97,110.92 70.08,110.92 70.08,108.98 70.06,108.96 70.04,108.94 70.02,108.92
  pour Bottom: 169.04,65.94 169.02,65.92 91.98,65.92 91.96,65.94 91.94,65.96 91.92,65.98 91.92,110.92 0.08,110.92 0.08,0.08 169.92,0.08 169.92,66.82
GPIO8
  Top 0.152: R1.2 19.51,42.29 19.81,42.29 20.5,42.98 20.5,45.26 19.81,45.95 19.81,46.25 U2.10
I2C_PW  (via drill 0.35)
  Top 0.3: R2-PINH.2 159.79,7.32 R1-PINH.2 | C2.1 157.43,6.1 158.65,6.1 C1.1 158.65,6.17 159.18,6.71 159.26,6.71 159.72,7.16 R2-PINH.2 | 158.8,11.89 159.11,11.89 159.49,11.51 159.49,11.12 SENSOR2.6 159.64,10.97 159.64,7.39 R2-PINH.2 | 158.8,11.89 158.34,11.89 157.96,11.51 157.96,11.12 SENSOR2.8 | 158.8,11.89 158.8,13.95 SENSOR2.2 158.65,14.1 158.65,14.48 149.88,23.24 v89.99,23.24 | v22.33,57.84 22.33,63.78 U2.17
  Bottom 0.3: v22.33,57.84 22.33,57 27.36,51.97 27.66,51.97 28.27,51.36 28.27,36.35 36.88,27.74 85.5,27.74 v89.99,23.24
INT_RTC  (via drill 0.35)
  Top 0.152: v88.09,58.52 92.73,53.87 R1-PINH1.1 | U3.3 86.87,61.72 v86.87,59.74 84.43,59.74 80.31,55.63 v44.65,55.63 | v19.89,49.23 17.3,46.63 17.3,46.33 U2.8 | v24.54,49.23 29.26,49.23 v33.76,44.73 | v33.76,31.85 33.76,28.8 TP15.TP
  Bottom 0.152: v86.87,59.74 v88.09,58.52 | v24.54,49.23 v19.89,49.23 | v33.76,31.85 v33.76,44.73 v44.65,55.63
IO/BOOT
  Top 0.152: R_BOOT.2 51.66,106.07 51.51,106.07 50.37,107.21 BOOT_BUTTON.3 50.29,107.14 48.46,107.14 47.74,106.41 | C6.1 45.34,107.37 46.63,107.37 46.79,107.21 BOOT_BUTTON.4 46.86,107.14 47.02,107.14 47.74,106.41 | 47.74,106.41 47.78,106.38 47.78,105.08 47.62,104.93 47.02,104.93 46.18,104.09 46.18,104.01 24.92,82.75 24.92,63.86 U2.15
IO/CHANGE  (via drill 0.35)
  Top 0.152: C10.1 67.13,107.37 65.76,107.37 65.61,107.21 CHANGE_BUTTON.3 62.1,107.21 CHANGE_BUTTON.4 62.03,107.14 61.87,107.14 60.81,106.07 60.81,105.92 R_CHANGE.2 v56.46,105.84 | v17.45,66.83 14.71,64.08 14.71,63.86 U2.23
  Bottom 0.152: v56.46,105.84 v17.45,66.83
MISO  (via drill 0.35)
  Top 0.152: v19.36,57.23 32.54,57.23 U1.2 | v9.6,65.15 9.6,63.86 U2.27 | D12.1 11.89,98.07 10.82,99.14 9.53,99.14 R8.1 9.53,99.06 v9.53,96.85 | v8,95.33 6.48,93.8 6.1,93.8 J4.P7 | v45.03,95.33 45.34,95.02 77.34,95.02 TP6.TP
  Bottom 0.152: 10.86,65.72 10.82,65.76 10.21,65.76 v9.6,65.15 | 10.86,65.72 v19.36,57.23 | v9.53,96.85 9.18,96.51 | 9.18,96.51 v8,95.33 | v45.03,95.33 26.21,95.33 18.59,87.71 17.98,87.71 17.49,88.2 | 9.18,96.51 17.49,88.2 | 17.49,88.2 10.9,81.61 10.9,65.76 10.86,65.72
MOSI  (via drill 0.35)
  Top 0.152: v83.29,17.68 84.51,17.68 85.34,16.84 85.34,16.23 85.27,16.15 85.27,15.39 J1.14 | v75.13,21.03 75.13,21.64 74.75,22.02 D11.1 74.68,22.1 73.53,23.24 73.53,25.15 R7.1 73.46,25.22 73.08,25.22 v62.48,35.81 | v41.38,55.7 40.39,54.71 U1.5 | v30.18,53.65 29.72,53.65 27.81,51.74 21.11,51.74 16,46.63 16,46.33 U2.7 | v13.18,82.98 6.86,89.31 6.1,89.31 J4.P3 | TP7.TP 87.33,94.94 v52.43,60.05 52.5,60.05 v53.72,58.83
  Bottom 0.152: v83.29,17.68 80.85,17.68 77.5,21.03 v75.13,21.03 | v13.18,82.98 13.18,70.18 29.64,53.72 30.18,53.72 v30.18,53.65 32.23,55.7 v41.38,55.7 45.72,60.05 v52.43,60.05 | v62.48,35.81 62.48,50.06 v53.72,58.83
N$1
  Top 0.152: 125.81,39.85 126.34,39.85 126.49,40.01 IC1.3 | 125.81,39.85 125.42,39.85 | 125.42,39.85 123.75,39.85 D2.1 | 125.42,39.85 125.42,37.64 C1_BAT1.1 | 125.81,39.85 125.81,41.38 126.34,41.91 126.49,41.91 IC1.1 126.57,41.99 127.41,42.82 128.78,42.82 133.2,47.24 137.62,47.24 138.23,46.63 138.99,46.63 Q1.2
N$2
  Top 0.152: R2-USB1.1 153.85,46.63 154,46.63 156.06,48.69 157.66,48.69 161.85,52.88 163.68,52.88 J2.A5
N$3
  Top 0.152: J1.24 80.24,15.39 78.49,15.39 76.58,17.3 71.7,17.3 71.09,17.91 EPD_C12.1
N$4
  Top 0.152: C_DELAY.1 51.36,101.96 51.05,101.96 50.14,102.87 IC2.5
N$5
  Top 0.152: 85.42,29.49 86.94,29.49 88.47,31.01 D3.2 | 85.42,29.49 79.93,29.49 79.1,28.65 79.1,27.13 77.65,25.68 76.96,25.68 76.2,24.92 75.29,24.92 C4.1 | D4.1 83.82,33.53 85.42,31.93 85.42,29.49
N$6
  Top 0.152: R1_BAT.1 126.49,47.78 126.64,47.78 127.33,47.09 128.25,47.09 128.7,47.55 128.7,48.31 128.85,48.46 131.37,48.46 131.83,48.01 132.13,48.01 MCP73831.1
N$7
  Top 0.152: CHG_LED.C 126.42,49.68 126.42,49.15 127.71,47.85 R1_BAT.2
N$8  (via drill 0.35)
  Top 0.152: v160.55,50.22 154.99,44.65 R2-USB2.2 | v162.61,55.4 163.07,55.85 163.68,55.85 J2.B5
  Bottom 0.152: v160.55,50.22 160.55,53.34 v162.61,55.4
N$9
  Top 0.152: R2_BAT.2 129.24,46.41 129.24,47.62 129.54,47.93 MCP73831.5
N$10
  Top 0.152: J1.22 81.23,15.39 81.23,18.97 79.32,20.88 EPD_C10.1
N$12
  Top 0.152: J1.20 82.22,15.39 82.22,16.92 82.07,17.07 82.07,20.42 82.68,21.03 EPD_C8.1
N$13
  Top 0.152: J1.19 82.75,15.39 82.75,16.84 82.37,17.22 82.37,19.28 84.05,20.95 84.51,20.95 EPD_C7.1
N$14
  Top 0.152: J1.18 83.21,15.39 83.21,16.84 82.68,17.37 82.68,19.13 83.97,20.42 86.03,20.42 86.56,20.95 EPD_C6.1
N$16
  Top 0.152: J1.4 90.3,15.39 90.3,19.05 92.2,20.95 EPD_C1.1
N$17
  Top 0.152: J1.5 89.76,15.39 89.76,20.57 90.14,20.95 EPD_C2.1
N$22
  Top 0.152: R_CAPACITOR.1 89.23,63.86 87.25,65.84 D7.1
PREVGH
  Top 0.152: J1.21 81.69,15.39 81.69,20.19 80.85,21.03 EPD_C9.1 81,20.95 81.84,21.79 81.84,22.71 82.14,23.01 82.83,23.01 86.87,27.05 88.09,27.05 D5.1
PREVGL
  Top 0.152: 78.56,17.91 80.7,15.77 80.7,15.39 J1.23 | 78.56,17.91 72.24,17.91 EPD_C11.1 | 78.56,17.91 78.56,21.41 78.72,21.57 79.78,21.57 79.93,21.72 81.31,21.72 81.53,21.95 81.53,22.78 81.31,23.01 75.97,23.01 74.6,24.38 74.6,26.98 80.31,32.69 80.31,33.98 D4.2
RESE  (via drill 0.35)
  Top 0.152: v89.53,13.72 90.75,14.94 90.75,15.32 J1.3 | v74.14,13.72 71.17,13.72 70.18,14.71 | 70.18,14.71 69.11,15.77 Q3.2 | 70.18,14.71 65.3,9.83 R3.1
  Bottom 0.152: v74.14,13.72 v89.53,13.72
RESE'
  Top 0.152: 67.13,9.6 66.75,9.6 66.6,9.75 R3.2 | 67.13,9.6 69.34,9.6 R2.2 | 67.13,9.6 67.13,8 SJ1.2
RESET  (via drill 0.35)
  Top 0.152: R_RESET.2 21.03,105.92 21.18,105.92 22.48,107.21 RESET_BUTTIN.4 22.55,107.21 25.98,107.21 RESET_BUTTIN.3 26.06,107.21 26.21,107.37 28.27,107.37 C5.1 28.35,107.37 29.03,106.68 v29.26,106.68 | v48.31,102.95 47.32,102.95 IC2.1 | v10.82,49.15 10.82,46.33 U2.3 | v10.52,65.15 10.52,77.57 18.29,85.34 v18.29,88.32
  Bottom 0.152: v48.31,102.95 32.99,102.95 32.96,102.98 | v29.26,106.68 32.96,102.98 | v10.82,49.15 10.82,50.9 10.29,51.44 10.29,64.92 v10.52,65.15 | 32.96,102.98 v18.29,88.32
RTC_RST
  Top 0.152: U2.16 23.62,63.78 23.62,63.48 27.28,59.82 43.05,59.82 45.34,57.53 81.76,57.53 85.57,61.34 85.57,61.72 U3.4
RX
  Top 0.152: U2.24 13.49,63.86 13.49,64.16 17.14,67.82 18.67,67.82 TP2.TP
SCK  (via drill 0.35)
  Top 0.152: v45.64,58.14 82.22,94.72 82.22,94.94 TP8.TP | v42.9,55.4 42.6,55.4 41.68,56.31 40.77,56.31 40.39,55.93 U1.6 40.31,55.85 40.31,55.63 39.62,54.94 39.62,52.2 49.68,42.14 49.68,40.23 49.53,40.08 44.88,40.08 44.12,39.32 D10.1 44.12,39.24 v45.64,37.72 | v84.73,18.29 85.72,17.3 85.72,15.39 J1.13 | 45.15,34.63 44.65,35.13 R6.1 | 45.15,34.63 46.22,33.57 | 46.22,33.57 v55.24,24.54 | 46.22,33.57 37.26,24.61 27.58,24.61 18.75,33.45 18.75,42.67 18.97,42.9 19.96,42.9 20.19,43.13 20.19,44.04 20.04,44.2 16.46,44.2 14.71,45.95 14.71,46.25 U2.6 14.63,46.33 14.63,46.63 v13.64,47.62 | v4.88,80.62 4.88,90.91 5.49,91.52 6.02,91.52 J4.P5 | 45.15,34.63 v45.64,35.13
  Bottom 0.152: v42.9,55.4 v45.64,58.14 | v84.73,18.29 78.49,24.54 v55.24,24.54 | v4.88,80.62 4.88,68.05 9.07,63.86 9.07,49.99 11.43,47.62 v13.64,47.62 | v45.64,35.13 v45.64,37.72
SCL  (via drill 0.35)
  Top 0.152: v161.16,11.2 161.54,10.82 161.54,6.93 161.31,6.71 160.32,6.71 159.79,6.17 159.79,6.02 R2-PINH.1 | v161.16,13.18 160.4,13.95 SENSOR2.4 | v150.65,51.82 150.5,51.66 142.26,51.66 142.19,51.74 141.66,51.74 U4.7 | v164.52,42.6 164.52,20.88 J3.4 164.44,20.88 164.21,20.65 v163.3,20.65 | v19.51,65.08 18.52,64.08 18.52,63.86 U2.20 | v88.77,56.77 88.77,53.11 89.38,52.5 U3.16
  Bottom 0.152: v161.16,11.2 v161.16,13.18 161.16,18.52 v163.3,20.65 | v164.52,42.6 155.3,51.82 v150.65,51.82 143.94,51.82 140.89,54.86 89.08,54.86 88.77,55.17 v88.77,56.77 81.61,63.93 20.95,63.93 19.81,65.08 v19.51,65.08
SDA  (via drill 0.35)
  Top 0.152: R1-PINH.1 160.86,6.02 161.09,6.02 161.85,6.78 161.85,11.43 159.56,13.72 159.56,13.95 SENSOR2.3 159.56,14.02 v159.56,17.83 | v142.57,52.27 141.66,52.27 U4.8 | v162.38,20.65 163.14,19.89 164.52,19.89 J3.3 | v20.73,65.08 19.81,64.16 19.81,63.86 U2.19 | v89.38,55.47 89.38,54.1 89.99,53.49 89.99,52.27 | 89.99,52.27 89.99,51.44 89.69,51.13 89.08,51.13 88.16,52.05 88.16,52.43 U3.15 | 89.99,52.27 v90.22,52.27
  Bottom 0.152: v159.56,17.83 v162.38,20.65 162.38,44.27 156.13,50.52 144.78,50.52 143.03,52.27 v142.57,52.27 v90.22,52.27 | v20.73,65.08 82.45,65.08 89.38,58.14 v89.38,55.47
SRC  (via drill 0.35)
  Top 0.152: 76.01,26.63 80.7,31.32 82.45,31.32 L1.1 82.53,31.32 v82.98,30.86 | 76.01,26.63 75.59,26.21 75.29,26.21 C4.2 | v71.48,25.91 68.43,22.86 68.43,17.98 Q3.3 | 76.01,26.63 v75.59,27.05 | v89.31,27.13 91.59,27.13 D5.2
  Bottom 0.152: v71.48,25.91 74.45,25.91 v75.59,27.05 | v89.31,27.13 86.72,27.13 v82.98,30.86
SS_SD  (via drill 0.35)
  Top 0.152: v49.76,35.81 49.15,35.2 48.92,35.2 R10.1 | v47.4,38.18 47.4,39.24 D8.1 | v9.68,51.21 12.12,48.77 12.12,46.33 U2.4 12.19,46.25 v12.19,42.6 | v7.39,87.33 J4.P2 | v21.72,38.33 v34.37,38.33
  Bottom 0.152: v49.76,35.81 v47.4,38.18 46.1,38.18 45.95,38.33 v34.37,38.33 | v9.68,51.21 9.68,64.16 7.39,66.45 v7.39,87.33 | v21.72,38.33 16.46,38.33 v12.19,42.6
TX
  Top 0.152: U2.25 12.19,63.86 12.19,65.61 14.48,67.89 TP1.TP
USB_D+  (via drill 0.35)
  Top 0.152: v140.36,52.88 150.5,52.88 152.4,50.98 D1.1 | v28.96,48.62 27.2,48.62 24.92,46.33 U2.14
  Bottom 0.152: v140.36,52.88 60.58,52.88 54.03,59.44 46.02,59.44 35.2,48.62 v28.96,48.62
USB_D-  (via drill 0.35)
  Top 0.152: v151.33,49 152.4,49 D1.3 | v34.37,39.24 30.33,39.24 23.62,45.95 23.62,46.25 U2.13
  Bottom 0.152: v151.33,49 76.58,49 62.79,35.2 51.28,35.2 47.24,39.24 v34.37,39.24
VBAT
  Top 0.3: MCP73831.3 132.21,49.84 132.44,50.06 134.95,50.06 C2_BAT.1 135.1,50.14 138.07,50.14 | U4.2 139.68,51.74 139.68,51.28 U4.3 139.52,51.28 139.22,51.28 | 138.07,50.14 138.07,48.69 Q1.3 | 139.22,51.28 138.07,50.14 | 139.22,51.28 138.91,51.59 138.91,52.5 148.28,61.87 150.34,61.87 TP3.TP
VBUS  (via drill 0.35)
  Top 0.3: 148.82,49 150.11,50.29 C5_USB.2 | 148.82,49 145.62,45.8 138.46,45.8 137.69,46.56 137.16,46.56 Q1.1 | R1_PWRUSB.2 121.92,41.22 122.99,41.22 123.67,41.91 D2.2 123.67,42.06 123.67,49.3 123.29,49.68 C1_BAT.1 123.29,49.84 124.05,50.6 127.03,50.6 127.79,49.84 CHG_LED.A 127.94,49.76 129.54,49.76 MCP73831.4 129.69,49.91 130.38,49.91 143.71,63.25 150.88,63.25 151.71,62.41 151.71,60.58 150.11,58.98 TP14.TP 150.04,58.83 150.04,57.15 154.91,52.27 | 154.91,52.27 156.97,52.27 C4_USB.2 | 154.91,52.27 154,51.36 154,50.52 154.53,49.99 154.91,49.99 D1.5 154.46,49.91 154,49.45 154,48.62 | v154.31,43.2 155.6,41.91 PFMP.050.1.2 | v154.31,48.16 154.31,48.31 154,48.62 | 148.82,49 149.5,48.31 153.69,48.31 154,48.62
  Bottom 0.3: v154.31,48.16 v154.31,43.2
VRTC
  Top 0.152: R_CAPACITOR.2 87.94,63.78 87.94,63.17 87.48,62.71 87.48,53.11 86.87,52.5 U3.14 86.87,52.43 86.87,52.05 89.08,49.84 89.23,49.84 C8.1 89.31,49.84 89.92,49.84 93.5,53.42 93.5,53.8 95.17,55.47 95.17,55.93 C10_SUPERCAP.1
VUSB  (4 unrouted)